# EAGLE board CodecDelay (EAGLE 6.5.0)
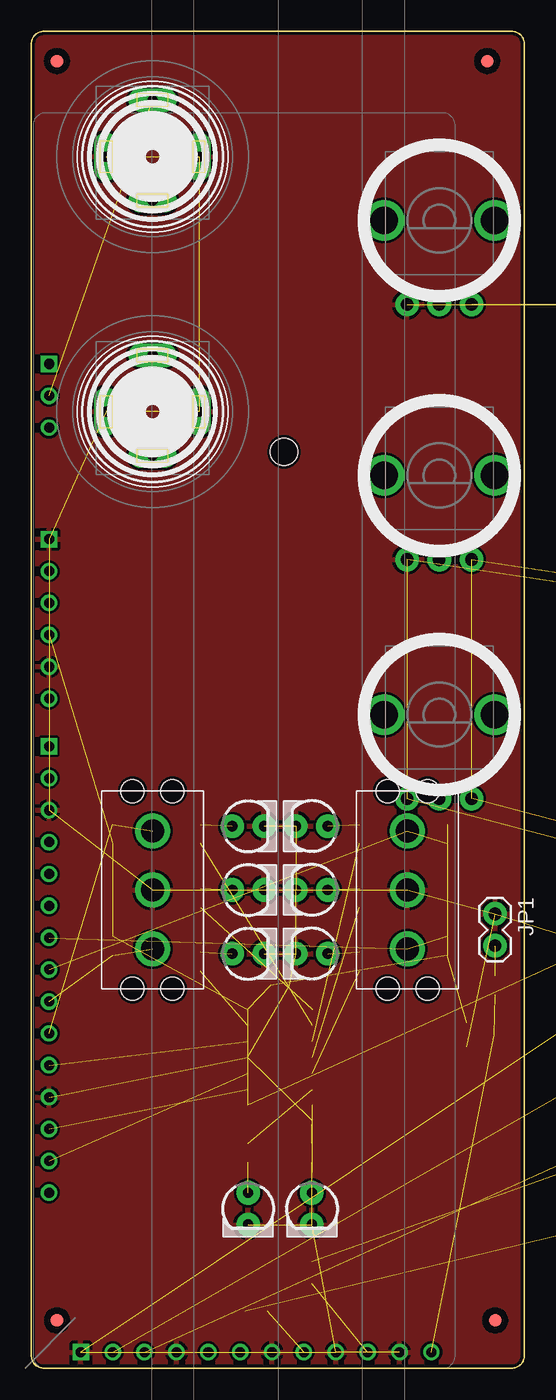
[diagram p0: board, top side]
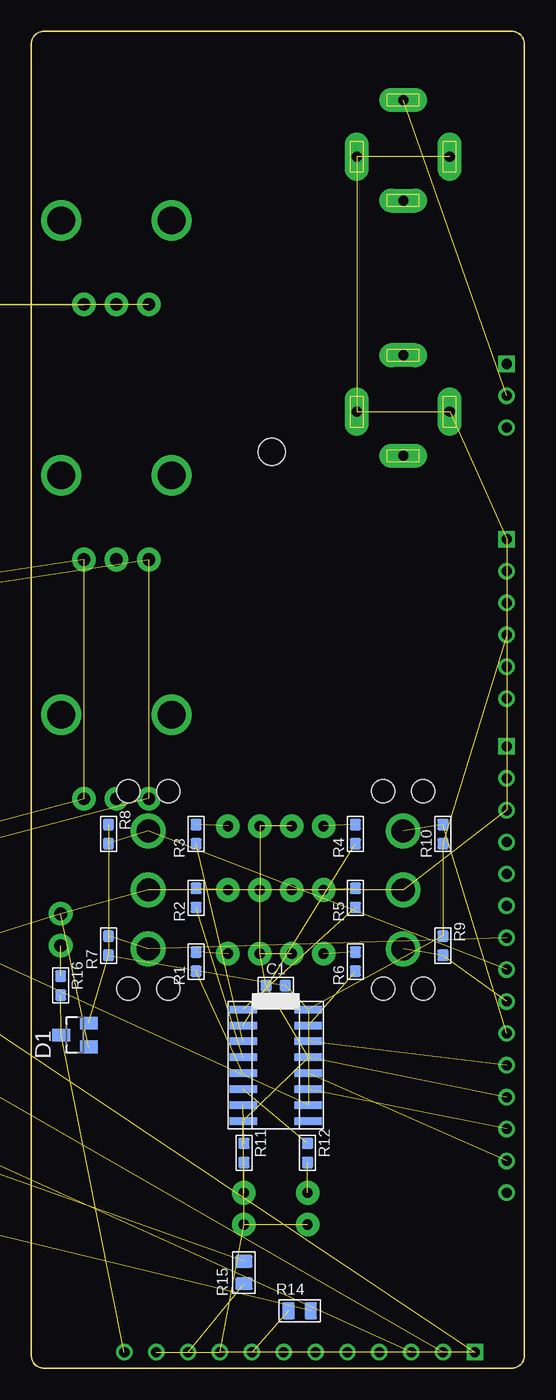
[diagram p1: board, bottom side, seen from below]

Size 39.3 x 106.5 mm. Coordinates in mm from the lower left corner, seen from the top.
Copper layers (1*16): Top 0.035mm / dielectric 1.5mm / Bottom 0.035mm
Design rules "FrontPanel *": minimum track width 6mil, minimum drill 12mil, track to track 8mil, track to pad 8mil, pad to pad 8mil, via to via 8mil, smd to smd 0mil, copper to edge 9mil, drill to drill 9mil, minimum pad ring 10mil, minimum via ring 6mil, stop-mask expansion 2mil, vias tented up to drill 100mil, thermal gap 10mil
Net classes: 0 default: width 0.203 mm

## Footprints (pad centres in the part's own frame; a part is rotated, then mirrored left to right if it is on the bottom)
C0603 = smd 0.889 x 0.889: 1 -0.762,0; 2 0.762,0
SOT23 = smd 1 x 1.4: 1 -0.95,-1.1; 2 0.95,-1.1; 3 0,1.1
SOIC-16 = smd 0.6 x 2.2: 1 -4.445,-2.6; 2 -3.175,-2.6; 3 -1.905,-2.6; 4 -0.635,-2.6; 5 0.635,-2.6; 6 1.905,-2.6; 7 3.175,-2.6; 8 4.445,-2.6; 9 4.445,2.6; 10 3.175,2.6; 11 1.905,2.6; 12 0.635,2.6; 13 -0.635,2.6; 14 -1.905,2.6; 15 -3.175,2.6; 16 -4.445,2.6
1X02 = drill 1.016 pad 1.88: 1 0,0; 2 2.54,0
LED3MM = drill 0.813 pad 1.88: A -1.27,0; K 1.27,0
R0603 = smd 0.889 x 0.889: 1 -0.762,0; 2 0.762,0
C0805 = smd 1.016 x 1.397: 1 -0.889,0; 2 0.889,0
MCUBASEBOARD = drill 0.8: 1.2V 1.27,53.34; 3.3V 1.27,58.42; +12V@1 13.97,1.27; +12V@2 1.27,63.5; -12V@1 16.51,1.27; -12V@2 1.27,60.96; ADC4 1.27,24.13; ADC6 1.27,13.97; ADC7 1.27,16.51; ADC8 1.27,41.91; ADC9 1.27,39.37; ADC12 1.27,36.83; ADC13 1.27,34.29; ADC14 1.27,26.67; CV_MIX1 1.27,77.47; CV_MIX2 1.27,74.93; GATE_IN 1.27,46.99; GND@2 11.43,1.27; GND@4 24.13,1.27; GND@5 29.21,1.27; GND@6 1.27,55.88; GND@7 1.27,44.45; GND@8 1.27,21.59; GND@9 19.05,1.27; IN_L 6.35,1.27; IN_R 8.89,1.27; OUT_DAC 31.75,1.27; OUT_L 21.59,1.27; OUT_R 26.67,1.27; RX/B16 1.27,31.75; TX/B17 1.27,29.21; TX/D7 1.27,19.05 | drill 0.8 square: CVBUS 1.27,80.01; GATE_BUS 1.27,49.53; GND@1 3.81,1.27; GND_BUS 1.27,66.04 | hole 2.2: 20,73
3.5MM-JACK-SWITCH-13MM-INPUT = drill 0.8 pad 1.93 long: RING@3 -3.7,0; SECOND@3 0,-3.5; SWITCH@3 3.7,0; TIP@3 0,4.5
3.5MM-JACK-SWITCH-13MM-OUTPUT = drill 0.8 pad 1.93 long: RING@3 -3.7,0; SECOND@3 0,-3.5; SWITCH@3 3.7,0; TIP@3 0,4.5
OG-POTS_ALPS_POT_VERTICAL = drill 1 pad 1.88: P$1 -2.58,-6.7; P$2 0,-6.7; P$3 2.58,-6.7 | drill 2.2 pad 3.175: P$4 4.4,0; P$5 -4.4,0
MULTICOMP1MS-ONOFFON = drill 1.85: 1 -4.7,0; 2 0,0; 3 4.7,0 | hole 1.85: -7.875,1.59; -7.875,-1.59; 7.875,1.59; 7.875,-1.59
FIDUCIAL_1MM = smd 1 x 1: 1 0,0

## Placement (x,y rotation side)
C1  100nF  [C0603]  19.82,30.48 0 bottom
D1  BAS70-04  [SOT23]  35.82,26.54 90 bottom
IC2  IC_74HC595-SOIC-16  [SOIC-16]  19.82,24.13 270 bottom
JP1  M02PTH  [1X02]  36.97,36.2 270 top
LED1  WHITE  [LED3MM]  17.28,33.02 0 top
LED2  WHITE  [LED3MM]  17.28,38.1 0 top
LED3  WHITE  [LED3MM]  17.28,43.18 0 top
LED4  WHITE  [LED3MM]  22.36,43.18 180 top
LED5  WHITE  [LED3MM]  22.36,38.1 180 top
LED6  WHITE  [LED3MM]  22.36,33.02 180 top
LED7  WHITE  [LED3MM]  17.28,12.7 270 top
LED8  WHITE  [LED3MM]  22.36,12.7 270 top
R1  50  [R0603]  26.17,32.38 90 bottom
R2  50  [R0603]  26.17,37.47 90 bottom
R3  50  [R0603]  26.17,42.55 90 bottom
R4  50  [R0603]  13.47,42.55 90 bottom
R5  50  [R0603]  13.47,37.47 90 bottom
R6  50  [R0603]  13.47,32.38 90 bottom
R7  10k  [R0603]  33.16,33.66 90 bottom
R8  10k  [R0603]  33.16,42.55 270 bottom
R9  10k  [R0603]  6.49,33.66 270 bottom
R10  10k  [R0603]  6.49,42.55 90 bottom
R11  50  [R0603]  22.36,17.14 270 bottom
R12  50  [R0603]  17.28,17.14 270 bottom
R14  300  [C0805]  17.91,4.57 0 bottom
R15  300  [C0805]  22.36,7.62 90 bottom
R16  300  [R0603]  36.97,30.48 270 bottom
U$1  MCUBOARD  [MCUBASEBOARD]  0.14,0 0 top
U$2  EURORACK_PCB8HP  [EURORACK8HPPCB]  -0.5,0 0 top
U$3  CV 1  [3.5MM-JACK-SWITCH-13MM-INPUT]  9.66,96.52 0 top
U$4  CV 2  [3.5MM-JACK-SWITCH-13MM-INPUT]  9.66,76.2 0 top
U$5  IN 1  [3.5MM-JACK-SWITCH-13MM-INPUT]  63,29.21 0 top  (outside the outline)
U$6  IN 2  [3.5MM-JACK-SWITCH-13MM-INPUT]  94.75,35.56 0 top  (outside the outline)
U$7  OUT 1  [3.5MM-JACK-SWITCH-13MM-OUTPUT]  69.35,12.7 0 top  (outside the outline)
U$8  OUT 2  [3.5MM-JACK-SWITCH-13MM-OUTPUT]  106.18,26.67 0 top  (outside the outline)
U$9  DRIVE  [OG-POTS_ALPS_POT_VERTICAL]  56.65,45.72 0 top  (outside the outline)
U$10  DRIVE  [OG-POTS_ALPS_POT_VERTICAL]  32.52,52.07 0 top
U$11  DRIVE  [OG-POTS_ALPS_POT_VERTICAL]  32.52,71.12 0 top
U$12  ONOFFON  [MULTICOMP1MS-ONOFFON]  29.98,38.1 90 top
U$13  ONOFFON  [MULTICOMP1MS-ONOFFON]  9.66,38.1 90 top
U$14  DRIVE  [OG-POTS_ALPS_POT_VERTICAL]  82.05,58.42 0 top  (outside the outline)
U$15  FIDUCIAL  [FIDUCIAL_1MM]  2.04,104.14 0 top
U$16  FIDUCIAL  [FIDUCIAL_1MM]  36.33,104.14 0 top
U$17  FIDUCIAL  [FIDUCIAL_1MM]  2.04,3.81 0 top
U$18  FIDUCIAL  [FIDUCIAL_1MM]  36.97,3.81 0 top
U$19  DRIVE  [OG-POTS_ALPS_POT_VERTICAL]  57.92,67.31 0 top  (outside the outline)
U$20  DRIVE  [OG-POTS_ALPS_POT_VERTICAL]  57.92,91.44 0 top  (outside the outline)
U$21  DRIVE  [OG-POTS_ALPS_POT_VERTICAL]  32.52,91.44 0 top

## Library data of the parts
C1 R1-R12 R14-R16 = OPL
D1 = diode
IC2 = dp_devices
JP1 = SparkFun-Connectors
LED1-LED8 = SparkFun-LED
U$1 U$2 U$12 U$13 = EurorackModularParts
U$3 U$5 U$6 = EurorackModularParts; DESC: Input; MPN: PJ-341; VALUE: PJ-341
U$4 = EurorackModularParts; DESC: Clock; MPN: PJ-341; VALUE: PJ-341
U$7 U$8 = EurorackModularParts; DESC: Output; MPN: PJ-341; VALUE: PJ-341
U$9 = EurorackModularParts; DESC: Feedback
U$10 = EurorackModularParts; DESC: Mix
U$11 = EurorackModularParts; DESC: CV Amt
U$14 = EurorackModularParts; DESC: Temperature
U$15-U$18 = adafruit
U$19 = EurorackModularParts; DESC: Time
U$20 = EurorackModularParts; DESC: Ducking
U$21 = EurorackModularParts; DESC: Multitap Amt

## Nets
3.3V: C1.2 D1.2 IC2.10 IC2.16 R7.1 R8.1 R9.1 R10.1 U$1.3.3V U$9.P$3 U$10.P$3 U$11.P$3 U$14.P$3 U$19.P$3 U$20.P$3 U$21.P$3
GND: C1.1 D1.1 IC2.8 IC2.13 JP1.1 LED1.K LED2.K LED3.K LED4.K LED5.K LED6.K LED7.K LED8.K U$1.GND@1 U$1.GND@2 U$1.GND@4 U$1.GND@5 U$1.GND@6 U$1.GND@7 U$1.GND@8 U$1.GND@9 U$1.GND_BUS U$3.RING@3 U$3.SWITCH@3 U$4.RING@3 U$4.SWITCH@3 U$5.RING@3 U$5.SWITCH@3 U$6.RING@3 U$7.RING@3 U$8.RING@3 U$9.P$1 U$10.P$1 U$11.P$1 U$12.2 U$13.2 U$14.P$1 U$19.P$1 U$20.P$1 U$21.P$1
LEDB1: IC2.15 R6.1
LEDB2: IC2.1 R5.1
LEDB3: IC2.2 R4.1
LEDB4: IC2.3 R3.1
LEDB5: IC2.4 R2.1
LEDB6: IC2.5 R1.1
LEDB7: IC2.6 R12.1
LEDB8: IC2.7 R11.1
LEDCLOCK: IC2.11 U$1.TX/D7
LEDDAT: IC2.14 U$1.ADC4
LEDLATCH: IC2.12 U$1.ADC7
MODE1_A: R7.2 U$1.ADC13 U$12.1
MODE1_B: R8.2 U$1.RX/B16 U$12.3
MODE2_A: R9.2 U$1.TX/B17 U$13.1
MODE2_B: R10.2 U$1.ADC14 U$13.3
N$1: U$1.IN_L U$5.TIP@3
N$2: U$1.IN_R U$6.TIP@3
N$3: U$1.CV_MIX1 U$3.TIP@3
N$4: U$1.CV_MIX2
N$5: R14.2 U$7.TIP@3
N$6: R15.2 U$6.SWITCH@3 U$8.TIP@3
N$7: U$4.TIP@3
N$8: LED1.A R6.2
N$9: LED2.A R5.2
N$11: R14.1 U$1.OUT_L
N$12: R15.1 U$1.OUT_R
N$13: D1.3 R16.2 U$1.OUT_DAC
N$14: LED3.A R4.2
N$15: LED4.A R3.2
N$16: LED5.A R2.2
N$17: LED6.A R1.2
N$18: LED7.A R12.2
N$19: LED8.A R11.2
N$20: JP1.2 R16.1

## Tracks (layer width: path | path; a pad name or v marks a point on that pad's centre or on a via)
3.3V  (15 unrouted)
GND  (39 unrouted)
  pour Top: -0.5,106.68 40.14,106.68 40.14,-1.27 -0.5,-1.27
LEDB1  (1 unrouted)
LEDB2  (1 unrouted)
LEDB3  (1 unrouted)
LEDB4  (1 unrouted)
LEDB5  (1 unrouted)
LEDB6  (1 unrouted)
LEDB7  (1 unrouted)
LEDB8  (1 unrouted)
LEDCLOCK  (1 unrouted)
LEDDAT  (1 unrouted)
LEDLATCH  (1 unrouted)
MODE1_A  (2 unrouted)
MODE1_B  (2 unrouted)
MODE2_A  (2 unrouted)
MODE2_B  (2 unrouted)
N$1  (2 unrouted)
N$2  (2 unrouted)
N$3  (2 unrouted)
N$5  (2 unrouted)
N$6  (2 unrouted)
N$7  (1 unrouted)
N$8  (1 unrouted)
N$9  (1 unrouted)
N$11  (1 unrouted)
N$12  (1 unrouted)
N$13  (2 unrouted)
N$14  (1 unrouted)
N$15  (1 unrouted)
N$16  (1 unrouted)
N$17  (1 unrouted)
N$18  (1 unrouted)
N$19  (1 unrouted)
N$20  (1 unrouted)